# Altium PCB faketec-yuri_v1.1.PcbDoc
Units mm, origin at the board's own origin, x right, y up, seen from the top; angles counter-clockwise.
Board outline 51.18 x 53.34 mm, 2 copper layers (Top Layer, Bottom Layer); 33 components, 36 nets, 196 pads, 147 vias.
Unrouted connection lines stored in the file: 2.
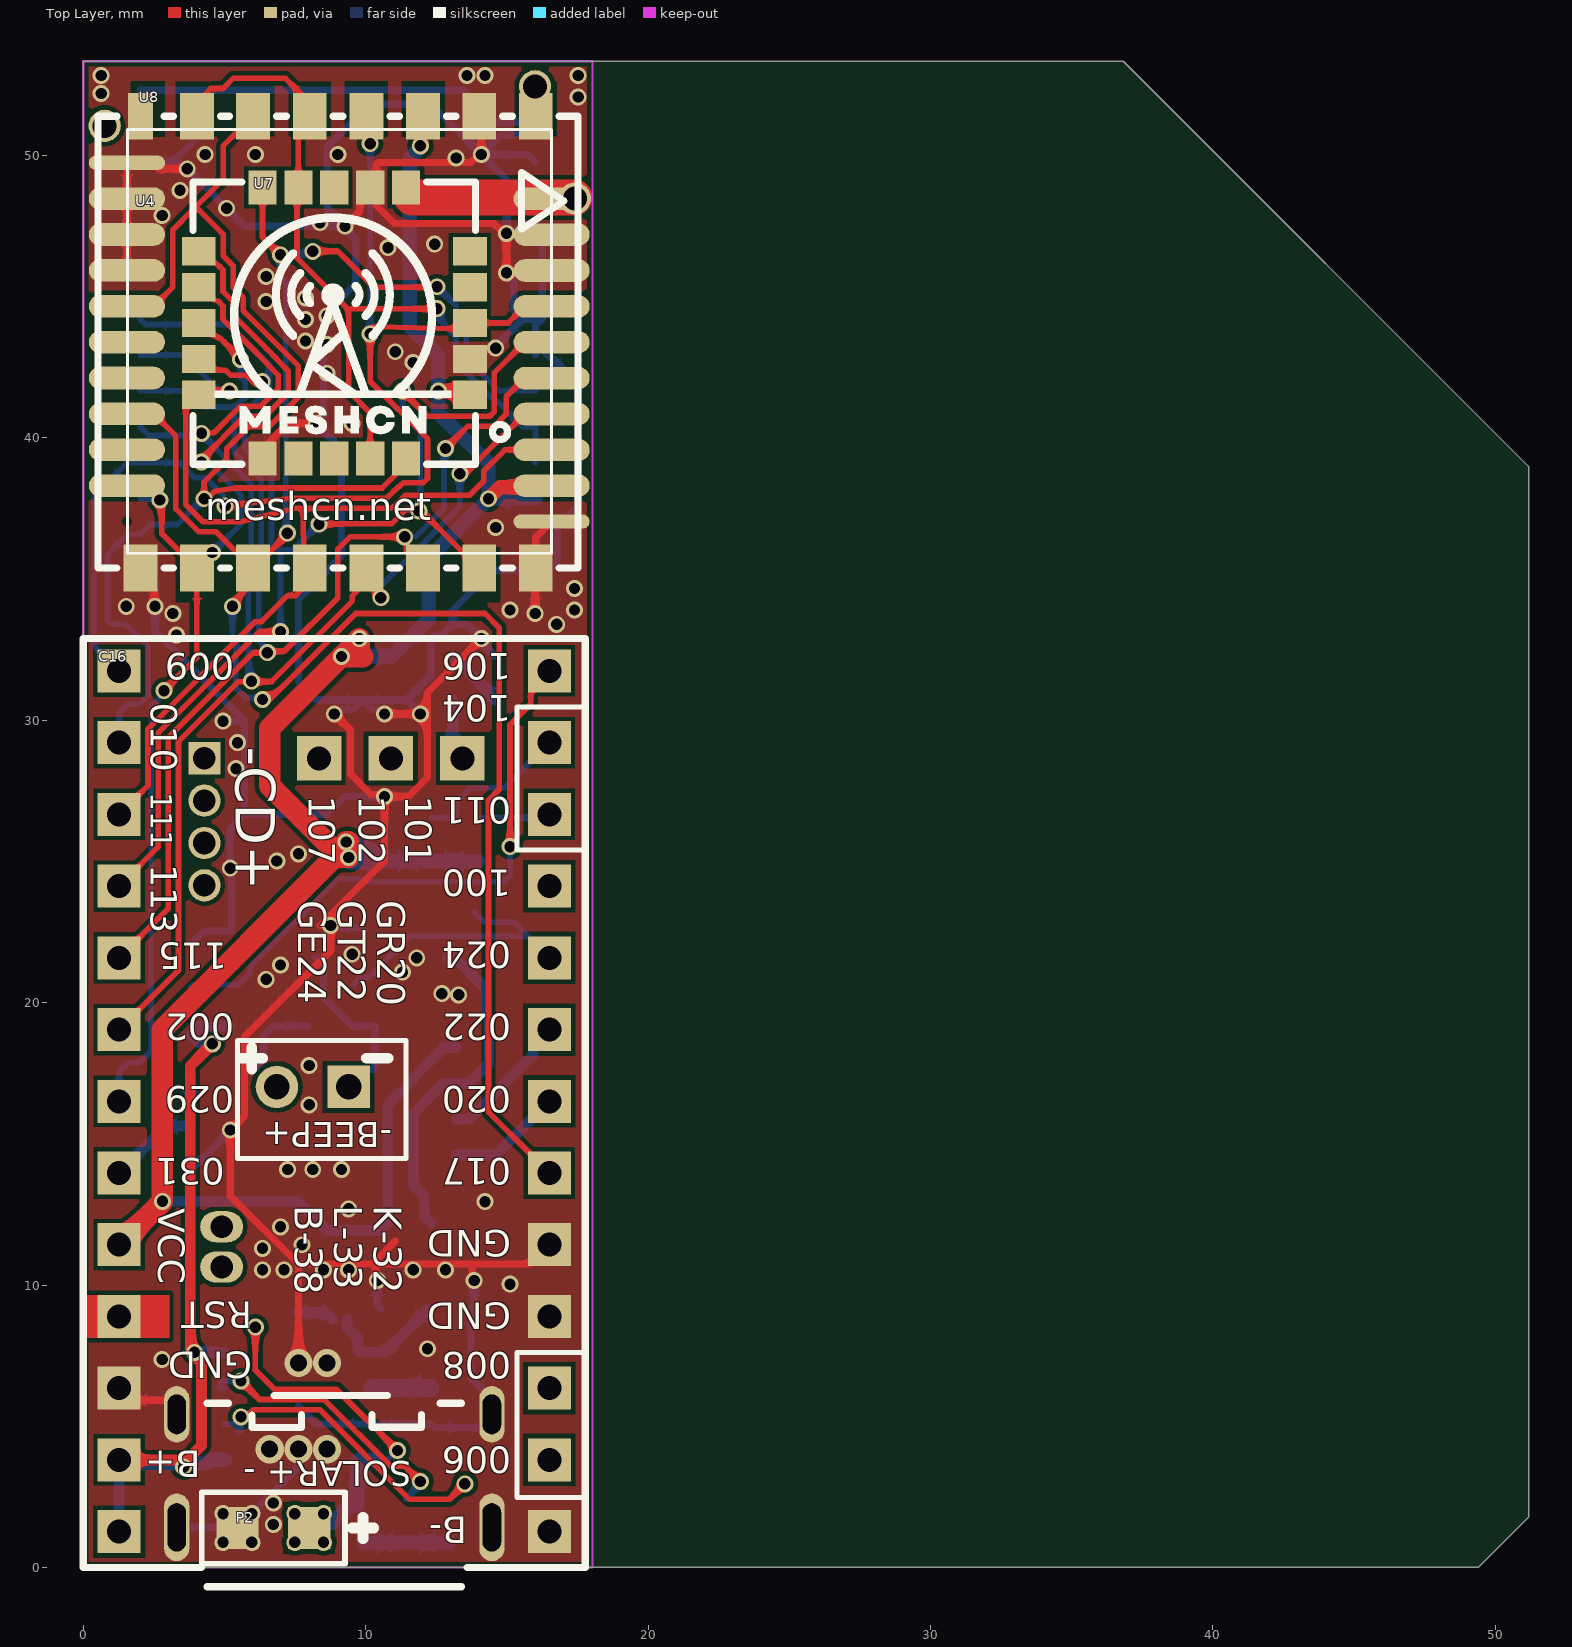
[diagram p0: Top Layer view]
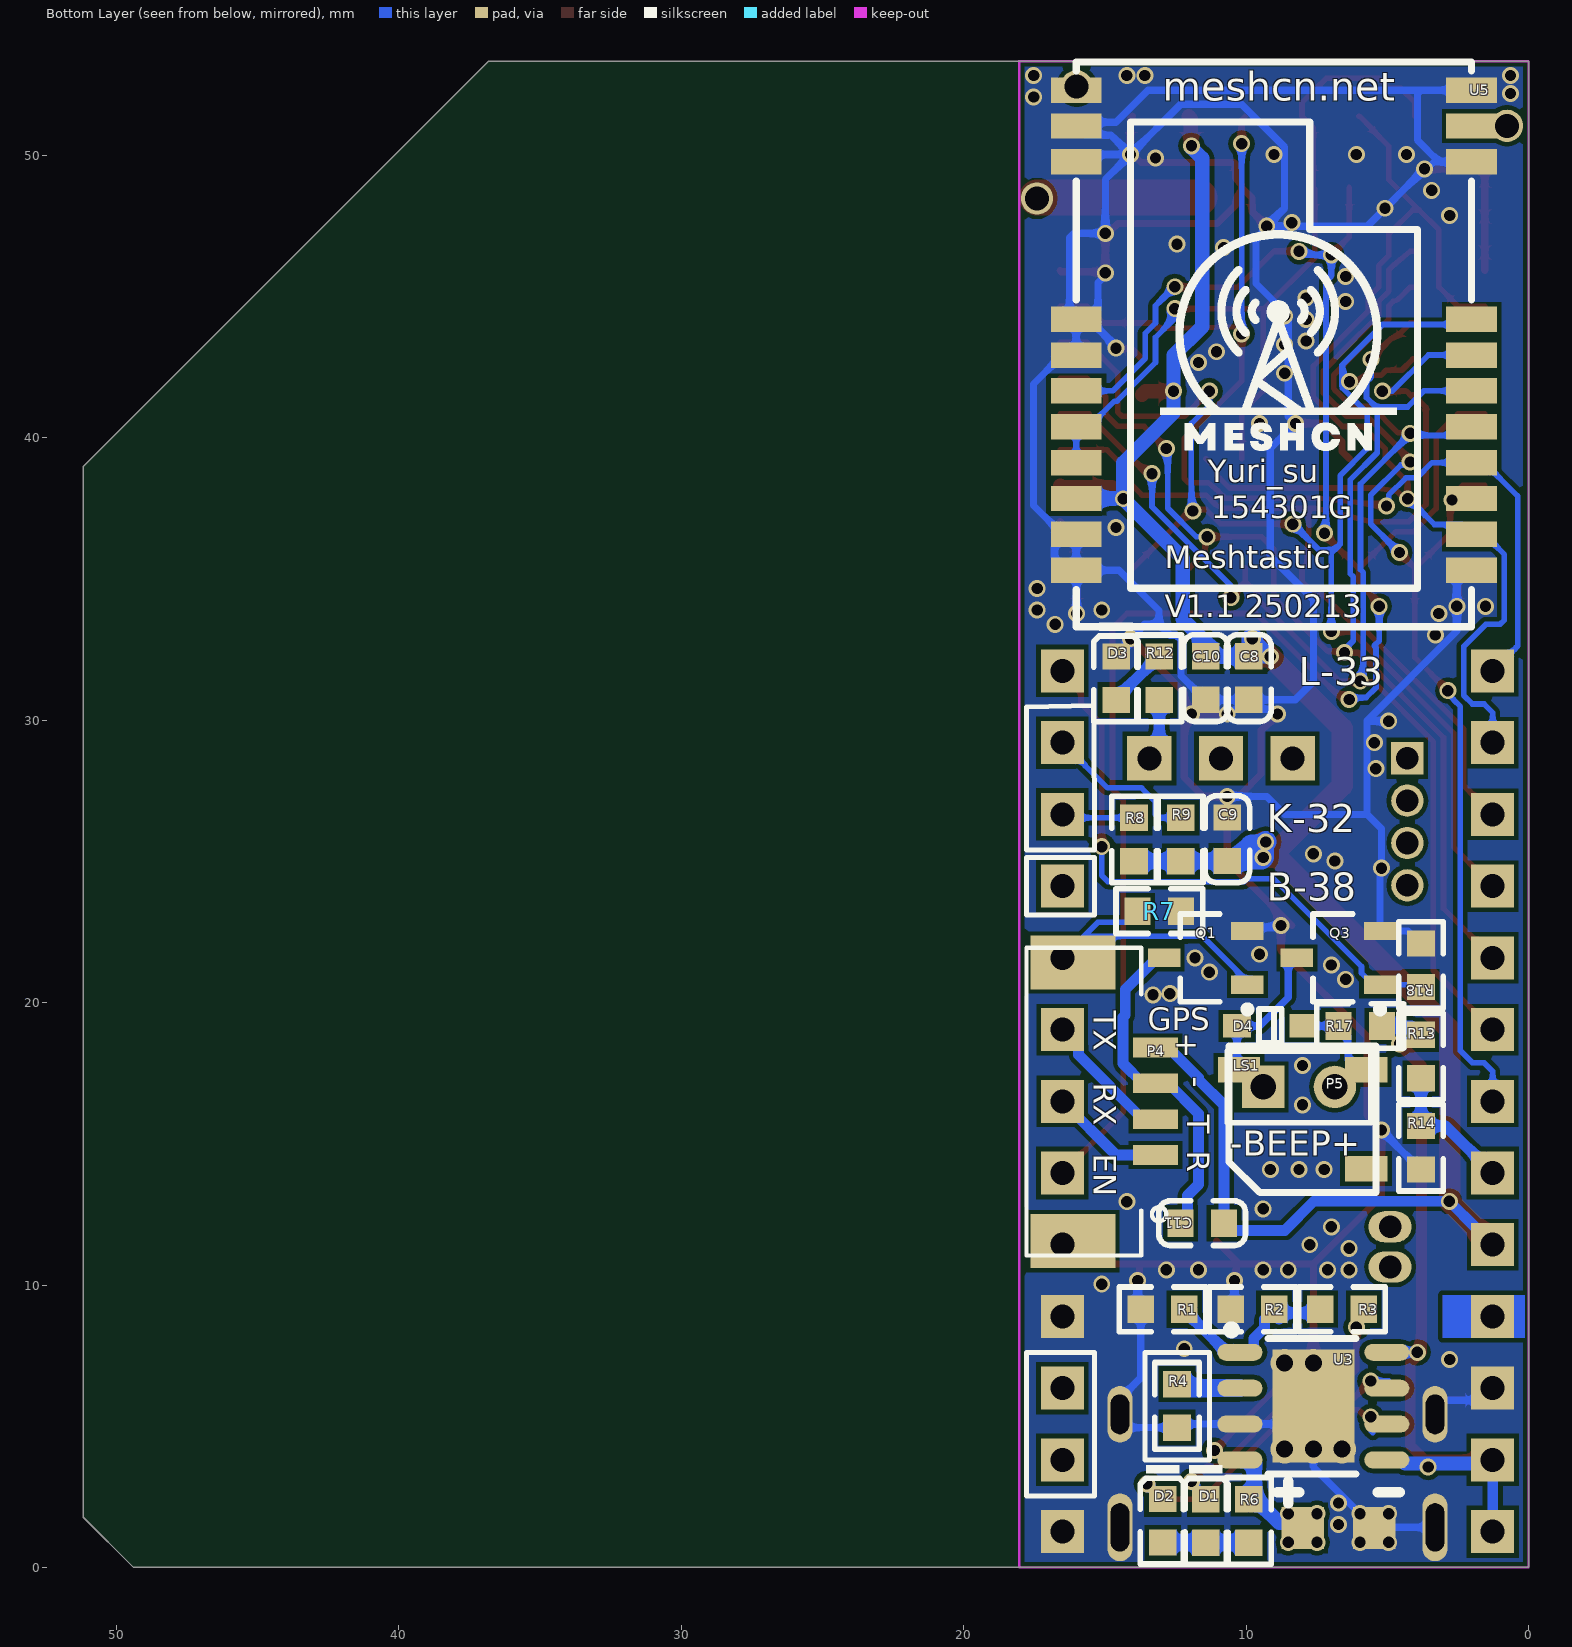
[diagram p1: Bottom Layer view, seen from below]
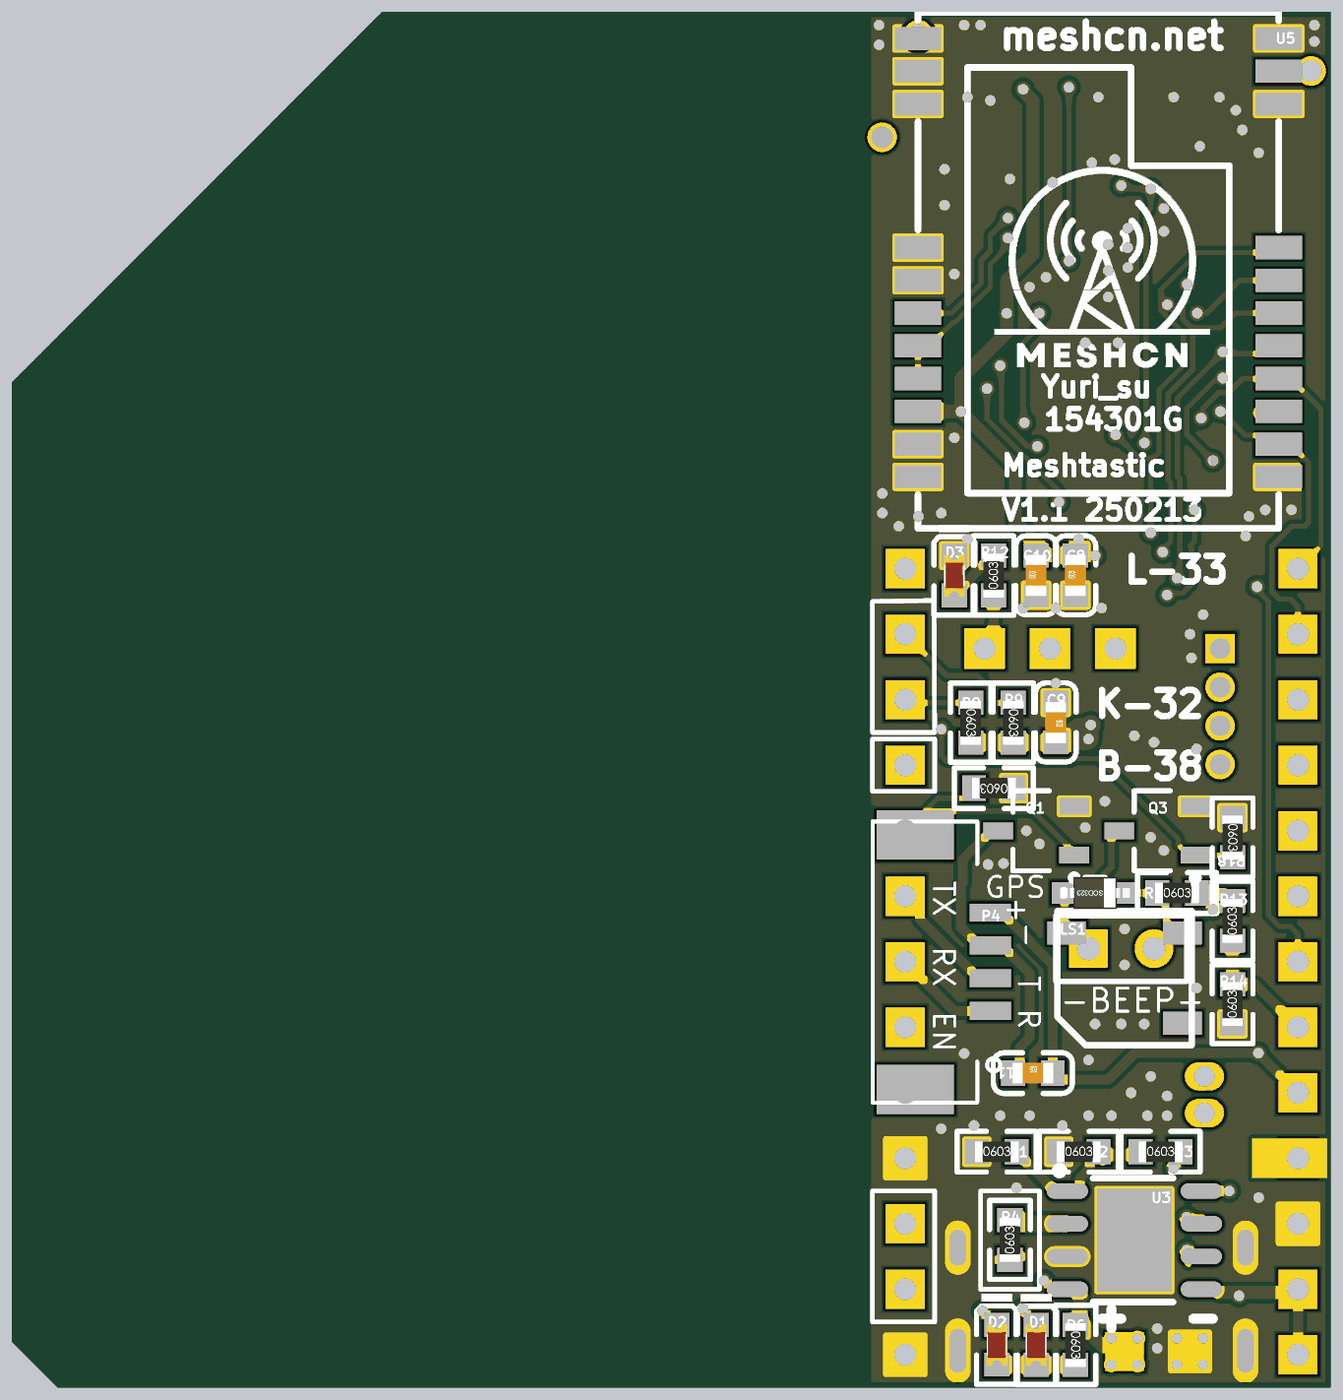
[diagram p2: 3D render of the assembled board from below, using the file's embedded part models]

## Layer stack, top to bottom
Top Solder: solder mask 0.0102, Solder Resist, Dk 3.5
Top Layer: signal copper 0.0356
Dielectric 1: dielectric 0.32, FR-4, Dk 4.8
Bottom Layer: signal copper 0.0356
Bottom Solder: solder mask 0.0102, Solder Resist, Dk 3.5

## Board outline
0,0 0,53.34 36.83,53.34 51.181,38.989 51.181,1.778 49.403,0 0,0

## Design rules (kind name [scope] priority, off if disabled: settings)
Clearance [All] p1: gap=0.16 ignorepadtopadclearanceinfootprint=FALSE except(0: Arc-Hole Track-Hole SMDPad-Hole THPad-Hole Via-Hole Fill-Hole Poly-Hole Region-Hole Text-Hole)
ComponentClearance [All] p1: gap=-100 collisioncheckmode=3 verticalgap=0.254 showdistances=FALSE
HoleSize [All] p1: absolutevalues=TRUE maxlimit=5 minlimit=0.025 maxpercent=80.000 minpercent=20.000
HoleSize Testpoint [All] p2: absolutevalues=TRUE maxlimit=2.54 minlimit=0.025 maxpercent=80.000 minpercent=20.000
HoleSize TestPointUsage [All] p3: absolutevalues=TRUE maxlimit=2.54 minlimit=0.025 maxpercent=80.000 minpercent=20.000
HoleToHoleClearance [All] p1: gap=0 allowstackedmicrovias=TRUE
MinimumSolderMaskSliver [All] p1: minsoldermaskwidth=0
PlaneClearance [All] p1: clearance=0.35
PlaneConnect [All] p1: planeconnectstyle=Direct reliefexpansion=0.508 reliefentries=4 reliefconductorwidth=0.254 reliefairgap=0.254
PolygonConnect [All] p1: connectstyle=Direct reliefconductorwidth=0.4 reliefentries=4 polygonreliefangle="90 Angle" airgapwidth=0.254
RoutingVias [All] p1: holewidth=0.4 width=0.7 viastyle="Through Hole" minholewidth=0.3 minwidth=0.6 maxholewidth=2 maxwidth=4
SilkToSilkClearance [All] p1: silktosilkclearance=0
SilkToSolderMaskClearance [IsPad] p1: minsilkscreentomaskgap=0 clearancetoexposedcopper=TRUE
SolderMaskExpansion [All] p1: expansion=0.102 istentingtop=FALSE
Width [All] p1: maxlimit=10 minlimit=0.2 preferedwidth=0.254 minimp=50.000000 maximp=50.000000 favimp=50.000000
22 further rules are at their usual default settings.

## Components (designator, comment, footprint, x,y, rotation, side; value= is the part's Value field where it differs from the comment)
C8 "22uF (226) 20% 6.3V" 0603_C 9.906,31.496 r90 bottom
C9 "22uF (226) 20% 6.3V" 0603_C 10.668,25.789 r270 bottom
C10 "22uF (226) 20% 6.3V" 0603_C 11.43,31.496 r90 bottom
C11 "22uF (226) 20% 6.3V" 0603_C 11.557,12.192 r180 bottom
C16 "PROMICRO NRF52840 方形焊盘-BBB" "PROMICRO NRF52840" 8.763,15.24 r180 top locked
D1 "红灯 0603" 0603_LED_S1 11.43,1.651 r270 bottom
D2 "绿灯 0603" 0603_LED_S1 12.954,1.659 r270 bottom
D3 "蓝灯 0603" 0603_LED_S1 14.605,31.488 r270 bottom
D4 "1N4148WS T4" SOD-323 9.144,19.177 r0 bottom
LS1 "5020蜂鸣器" PB5020 8.001,15.875 r0 bottom
P2 "SOLAR" HDR1X2#1 5.461,1.397 r0 top
P4 "GPS" HT1.25-4 13.208,14.605 r90 bottom
P5 "BEEP" HDR1X2#2 9.398,17.018 r180 bottom
Q1 "AO3400A N道沟 X0YV1T SOT-23" SOT-23-3L 11.43,21.59 r180 bottom
Q3 "AO3400A N道沟 X0YV1T SOT-23" SOT-23-3L 6.731,21.59 r180 bottom
R1 "SDNT1608X103F3450FTF" 0603_R 12.962,9.144 r180 bottom
R2 "10K" 0603_R 9.779,9.144 r180 bottom
R3 "2K" 0603_R 6.604,9.144 r180 bottom
R4 "1.2K" 0603_R 12.446,5.723 r90 bottom
R6 "10K" 0603_R 9.906,1.651 r270 bottom
R7 "10K" 0603_R 13.073,23.241 r0 bottom
R8 "10K" 0603_R 13.97,25.781 r270 bottom
R9 "10K" 0603_R 12.319,25.781 r270 bottom
R12 "10R" 0603_R 13.081,31.488 r90 bottom
R13 "1M" 0603_R 3.81,18.097 r90 bottom
R14 "1.5M" 0603_R 3.81,14.867 r90 bottom
R17 "10R" 0603_R 5.961,19.177 r180 bottom
R18 "10K" 0603_R 3.81,21.328 r270 bottom
U3 "CN3163" SOP-8_EP_150mil 7.62,5.715 r270 bottom
U4 "SX1268TZR4-GC" SX1268TZR4-GC 16.585,50.927 r270 top locked
U5 "E22-400M22S" E22-400M22S 9.017,43.815 r0 bottom locked
U7 "E22-400MM22S" E22-400MM22S 8.89,44.069 r180 top value=470MHz；433MHz
U8 "Ra-01s" RA-01 9.026,43.395 r270 top locked

## Footprints (in the part's own frame and the unit in brackets; to place one, negate y for a bottom-side part, rotate by r counter-clockwise, add the part's x,y. Pads: shape width x height; smd on the part's side, far side on the other; paste and mask are expansions set on the pad)
0603_C [mm]
  rect 0.93x0.98 smd: 1(-0.77,0) 2(0.77,0)
  silkscreen extent -1.53,-0.79 1.54,0.79, body extent -0.8,-0.4 0.8,0.4, height 0.3
0603_LED_S1 [mm]
  rect 0.93x0.98 smd: A(0.77,0) K(-0.77,0)
  silkscreen extent -1.97,-0.79 1.54,0.79, body extent -0.8,-0.4 0.8,0.4, height 0.6
0603_R [mm]
  rect 0.93x0.98 smd: 1(-0.77,0) 2(0.77,0)
  silkscreen extent -1.53,-0.79 1.54,0.79, body extent -0.85,-0.4 0.85,0.4, height 0.56
E22-400M22S [mm]
  rect 1.8x0.9 smd: 1(7,-8.5) 2(7,-7.23) 3(7,-5.96) 4(7,-0.39) 5(7,0.88) 6(7,2.15) 7(7,3.42) 8(7,4.69) 9(7,5.96) 10(7,7.23) 11(7,8.5) 12(-7,8.5) 13(-7,7.23) 14(-7,5.96) 15(-7,4.69) 16(-7,3.42) 17(-7,2.15) 18(-7,0.88) 19(-7,-0.39) 20(-7,-5.96) 21(-7,-7.23) 22(-7,-8.5)
  silkscreen extent -7,-9.5 7,10.5
E22-400MM22S [mm]
  rect 1.2x1 smd: 1(-4.8,2.54) 2(-4.8,1.27) 3(-4.8,0) 4(-4.8,-1.27) 5(-4.8,-2.54) 11(4.8,-2.54) 12(4.8,-1.27) 13(4.8,0) 14(4.8,1.27) 15(4.8,2.54)
  rect 1x1.2 smd: 6(-2.54,-4.8) 7(-1.27,-4.8) 8(0,-4.8) 9(1.27,-4.8) 10(2.54,-4.8) 16(2.54,4.8) 17(1.27,4.8) 18(0,4.8) 19(-1.27,4.8) 20(-2.54,4.8)
  silkscreen extent -6.14,-5 5,5
HDR1X2#1 [mm] "Connector; Header; 2 Position"
  rect 1.5x1.5 all layers, no hole: 1(0,0) 2(2.54,0)
  silkscreen extent -1.27,-1.27 3.81,1.27
HDR1X2#2 [mm] "Connector; Header; 2 Position"
  rect 1.5x1.5 hole 0.9: 1(0,0)
  round 1.5 hole 0.9: 2(2.54,0)
  silkscreen extent -1.27,-1.27 3.81,1.27
HT1.25-4 [mm]
  rect 1.905x3 smd: 0(-3.048,2.921) 0(6.818,2.921)
  rect 0.7x1.6 smd: 1(0,0) 2(1.27,0) 3(2.54,0) 4(3.81,0)
  silkscreen extent -3.56,-0.38 7.35,4.57
PB5020 [mm] "贴片电磁无源蜂鸣器"
  rect 1.5x0.9 smd: 1(-2.25,-1.75) 2(2.25,-1.75) 3(-2.25,1.75)
  silkscreen extent -2.6,-2.6 2.6,2.6, body extent -2.62,-2.58 2.6,2.58, height 2.2
"PROMICRO NRF52840" [mil]
  oval 60x43.31 hole 31.5: 0(152,124.97) 0(152,181.03)
  rect 45x45 hole 31.5: 0(176.03,-528.21)
  round 39.37 smd: 0(176.03,-528.21) 0(176.03,-469.15) 0(176.03,-410.13) 0(176.03,-351.09)
  round 45 hole 31.5: 0(176.03,-469.15) 0(176.03,-410.13) 0(176.03,-351.09)
  rect 60x60 hole 33.46: 1(295,550) 2(295,450) 3(295,350) 4(295,250) 5(295,150) 6(295,50) 7(295,-50) 8(295,-150) 9(295,-250) 10(295,-350) 11(295,-450) 12(295,-550) 13(295,-650) 14(-305,-650) 15(-305,-550) 16(-305,-450) 17(-305,-350) 18(-305,-250) 19(-305,-150) 20(-305,-50) 21(-305,50) 22(-305,150) 23(-305,250) 24(-305,350) 25(-305,450) 26(-305,550)
  oval 35x78.74 hole 25.59 slot 55.12 at 90 deg paste+0 mask+2: 26(-224.69,386.51) 26(214.68,386.51)
  oval 35x94.49 hole 25.59 slot 66.93 at 90 deg paste+0 mask+2: 26(-224.69,543.99) 26(214.68,543.99)
  rect 62x62 hole 33.46: 27(-183.74,-528.16) 28(-83.74,-528.16) 29(16.26,-528.16)
  silkscreen extent -355,-695 345,627
RA-01 [mm]
  rect 1.651x1.199 smd paste+0 mask+0.051: 1(-8,7) 2(-8,5) 3(-8,3.01) 4(-8,1.003) 5(-8,-1.003) 6(-8,-3.01) 7(-8,-5) 9(8,-7) 10(8,-5) 11(8,-3.01) 12(8,-1.003) 13(8,1.003) 14(8,3.01) 15(8,5) 16(8,7)
  rect 1.651x0.889 smd paste+0 mask+0.051: 8(-8,-7)
  silkscreen extent -8,-8.5 8,8.5
SOD-323 [mm]
  rect 1x0.83 smd: 1(1.18,0) 2(-1.18,0)
  silkscreen extent -0.4,-0.6 0.4,0.6, body extent -1.35,-0.63 1.35,0.62, height 1.1
SOP-8_EP_150mil [mm]
  oval 0.6x1.6 smd: 1(-1.905,-2.6) 2(-0.635,-2.6) 3(0.635,-2.6) 4(1.905,-2.6) 5(1.905,2.6) 6(0.635,2.6) 7(-0.635,2.6) 8(-1.905,2.6)
  rect 4x2.9 smd: 9(0,0)
  silkscreen extent -2.85,-3.05 2.4,1.5
SOT-23-3L [mm] "http://www.aosmd.com/res/packaging_information/SOT-23-3L.pdf"
  rect 1.15x0.65 smd: 1(1.475,-0.95) 2(1.475,0.95) 3(-1.475,0)
  silkscreen extent -0.9,-1.95 1.6,1.55, body extent -0.9,-1.55 0.9,1.55, height 1.25
SX1268TZR4-GC [mm]
  oval 0.508x2.7 smd: 1(1.184,-15.037) 12(13.888,0.002)
  oval 0.8x2.7 smd: 2(2.454,-15.037) 3(3.724,-15.037) 4(4.994,-15.037) 5(6.264,-15.037) 6(7.534,-15.037) 7(8.804,-15.037) 8(10.074,-15.037) 9(11.344,-15.037) 10(12.614,-15.037) 13(12.618,0.002) 14(11.348,0.002) 15(10.078,0.002) 16(8.808,0.002) 17(7.538,0.002) 18(6.268,0.002) 19(4.998,0.002) 20(3.728,0.002) 21(2.458,0.002)
  round 0.025 smd: 11(13.884,-15.037) 22(1.188,0.002)
  silkscreen extent 0,-15.01 15.01,0

## Part data
C8 C9 C10 C11: library part "0603 22uF (226) 20% 6.3V", "贴片电容", Package=0603, SuppliersPartNumber=C59461, ComponentLink1Description=供应商链接, ComponentLink1URL=http://www.szlcsc.com/product/details_60514.html, Supplier=LC
D1: library part "0603 黄灯", "发光二极管", Package=0603, SuppliersPartNumber=C72038, ComponentLink1Description=供应商链接, ComponentLink1URL=http://www.szlcsc.com/product/details_73147.html, Supplier=LC
D2: library part "0603 绿灯", "发光二极管", Package=0603, SuppliersPartNumber=C72043, ComponentLink1Description=供应商链接, ComponentLink1URL=http://www.szlcsc.com/product/details_73152.html, Supplier=LC
D3: library part "0603 蓝灯", "发光二极管", Package=0603, SuppliersPartNumber=C72041, ComponentLink1Description=供应商链接, ComponentLink1URL=http://www.szlcsc.com/product/details_73150.html, Supplier=LC
D4: library part "SOD-323 1N4148WS T4", "二极管", Package=SOD-323, SuppliersPartNumber=C2128, ComponentLink1Description=供应商链接, ComponentLink1URL=http://www.szlcsc.com/product/details_2485.html, Supplier=LC
LS1: library part Bell, "蜂鸣器", LatestRevisionDate=17-Jul-2002, LatestRevisionNote="Re-released for DXP Platform.", PackageReference=PIN2, Published=24-Mar-1999, WWW=https://item.szlcsc.com/97698.html
P2 P5: library part "Header 2", "Header, 2-Pin", LatestRevisionDate=17-Jul-2002, LatestRevisionNote="Re-released for DXP Platform.", Publisher="Altium Limited"
P4: library part "Header 4", "Header, 4-Pin", LatestRevisionDate=17-Jul-2002, LatestRevisionNote="Re-released for DXP Platform.", Publisher="Altium Limited"
Q1 Q3: "MOS(场效应管)", Package=SOT-23, SuppliersPartNumber=C20917, ComponentLink1Description=供应商链接, ComponentLink1URL=http://www.szlcsc.com/product/details_21629.html, Supplier=LC
R1 R2 R3 R4 R7 R18: library part "0603 2.4KΩ (2401) 1%", "贴片电阻", Package=0603, SuppliersPartNumber=C22940, ComponentLink1Description=供应商链接, ComponentLink1URL=http://www.szlcsc.com/product/details_23667.html, Supplier=LC
R6 R8 R9 R13 R14: library part Res2, "Resistor", LatestRevisionDate=17-Jul-2002, LatestRevisionNote="Re-released for DXP Platform.", PackageReference=AXIAL-0.4, Published=8-Jun-2000, Publisher="Altium Limited"
R12: library part "0603 10Ω (10R0) 1%", "贴片电阻", Package=0603, SuppliersPartNumber=C22859, ComponentLink1Description=供应商链接, ComponentLink1URL=http://www.szlcsc.com/product/details_23586.html, Supplier=LC
R17: library part "0603 100KΩ (1003) 1%", "贴片电容", Package=0603, SuppliersPartNumber=C25803, ComponentLink1Description=供应商链接, ComponentLink1URL=http://www.szlcsc.com/product/details_26546.html, Supplier=LC
U3: JLCPCB Part Class="Extended Part", Manufacturer=CONSONANCE(上海如韵), Add into BOM=yes, Convert to PCB=yes, Datasheet=https://atta.szlcsc.com/upload/public/pdf/source/20200525/C559031_07C3DFF767A107D34DBB0F6756A9105C.pdf, Device=CN3163, LCSC Part Name=CN3163, Manufacturer Part=CN3163, Supplier=LCSC, Supplier Footprint=ESOP-8, Supplier Part=C559031, Symbol=CN3163
U4: library part E22-400M22S, JLCPCB Part Class="Extended Part", Manufacturer=硅传, Add into BOM=yes, Convert to PCB=yes, Device=SX1268TZR4-GC, Manufacturer Part=SX1268TZR4-GC, Origin Footprint=WIRELM-SMD_E22-400M22S, Supplier=LCSC, Symbol=SX1268TZR4-GC
U5: JLCPCB Part Class="Extended Part", Manufacturer=EBYTE(亿佰特), Add into BOM=yes, Convert to PCB=yes, Device=E22-400M22S, Manufacturer Part=E22-400M22S, Origin Footprint=WIRELM-SMD_E22-400M22S, Supplier=LCSC, Supplier Part=C411291, Symbol=E22-400M22S
U7: library part E220-400MM22S, JLCPCB Part Class="Extended Part", LCSC Part Name=LoRa扩频无线模块进口LLCC68+PA+LNA低功耗433M小体积, Manufacturer=EBYTE(亿佰特), Add into BOM=yes, Convert to PCB=yes, Datasheet=https://atta.szlcsc.com/upload/public/pdf/source/20230113/ADF9FB7794EF3DB1C0D0199CB3018B5B.pdf, Device=E220-400MM22S, Manufacturer Part=E220-400MM22S, Supplier=LCSC, Supplier Footprint=SMD,10x10mm, Supplier Part=C5352932, Symbol=E220-400MM22S
U8: library part Ra-01, "SX1278LoRa扩频无线模块/超远10KM/433M/安信可Ra-01", JLCPCB Part Class=扩展库, LCSC Part Name="SX1278LoRa扩频无线模块/超远10KM/433M  配天线（两件套）", Manufacturer=Ai-Thinker(安信可), Add into BOM=yes, Convert to PCB=yes, Datasheet=https://atta.szlcsc.com/upload/public/pdf/source/20180719/C90040_7D0E540C57BE745D85EF9B627FE97069.pdf, Device=Ra-01, Manufacturer Part=Ra-01s, Supplier=LCSC, Supplier Footprint=-, Supplier Part=C90040, Symbol=RA-01
C16: Add into BOM=yes, Convert to PCB=yes, Device="PROMICRO NRF52840 方形焊盘-BBB", Origin Footprint="PROMICRO NRF52840", Supplier=JaDoma, Symbol="PROMICRO NRF52840 方形焊盘-BBB"

## Free pads (board coordinates)
  round 1.143 hole 0.85: 2(0.762,51.054) 2(16.002,52.451) 2(17.408,48.482)

## Via types
v1: diameter 0.6, hole 0.4, Top Layer to Bottom Layer, tented both sides, 142 vias
v2: diameter 1, hole 0.6, Top Layer to Bottom Layer, tented both sides, 5 vias

## Nets (pads, with @x,y where several pads share a name; then routed paths per layer and width w, separated by ;. In a path a pad name is that pad's centre, name@x,y a point inside that pad or via, vN(x,y) a via of type N, cw(c..) or ccw(c..) an arc to the next point about the centre after c; other vN are vias at no path point)
3V3: C8.2 C9.2 C10.2 C11.2 C16.5 P4.4 R8.2 R9.2 U4.13 U5.9 U7.1 U8.3 | length 85.4
  Top Layer w0.508: v1(11.938,50.343) 11.956,50.361 11.956,51.315 U8.3 ; v1(12.573,41.656) 13.563,41.656 U7.1 ; v1(14.351,37.846) 14.758,38.253 16.531,38.253 U4.13
  Top Layer w0.762: C16.5 2.794,12.954 2.794,19.05 8.89,25.146 v1(9.398,25.146) v1@9.398,25.693 ; 8.939,25.235 8.997,25.293 ; v1(9.31,25.693) 9.31,25.606 8.997,25.293 ; 8.997,25.293 6.604,27.686 6.604,29.718 v1(9.144,32.258) ; v1(9.144,32.258) 9.906,32.258 9.779,32.385 v1(9.779,32.893) v1(9.144,32.258)
  Bottom Layer w0.381: C16.5 1.841,12.002 v1(2.806,12.966) 7.608,12.966 8.636,11.938 10.533,11.938 C11.2 10.787,16.375 11.684,17.272 11.684,17.341 12.758,18.415 P4.4
  Bottom Layer w0.508: v1(9.144,32.258) v1@9.148,32.262 ; v1(9.31,25.693) 9.867,25.693 10.33,25.23 10.457,25.23 C9.2 ; v1(9.779,32.893) v1@9.148,32.262 ; C9.2@10.559,25.103 10.643,25.019 C9.2 ; v1(11.938,50.343) 11.938,50.28 11.557,49.899 11.557,43.942 12.573,42.926 v1(12.573,41.656) 12.573,40.894 14.351,39.116 v1(14.351,37.846) ; R8.2 13.966,25.015 10.672,25.015 C9.2 ; U5.9 14.36,37.855 v1(14.351,37.846) ; v1@9.148,32.262 9.902,32.262 C8.2 10.93,32.266 12.24,33.576 12.24,35.735 v1(14.351,37.846)
  Bottom Layer w0.762: v1(9.31,25.693) 9.398,25.606 v1(9.398,25.146) 9.441,25.103 C9.2@10.559,25.103 ; v1(9.779,32.893) 9.779,32.393 C8.2
ADC: C16.6 R13.1 R14.2 | length 4.9
  Bottom Layer w0.381: C16.6 2.937,15.637 R14.2 R13.1
ANT: pad.2 U4.21 U5.21 U7.6 U8.1 | length 5.8
  Top Layer w1.27: U7.6@11.643,48.514 pad.2@17.408,48.514
BAT: C16.1 C16.2 R13.2 R17.2 U3.5 U3.8 | length 27.9
  Top Layer w0.381: C16.2 3.683,3.81 4.191,4.318 4.191,7.239 v1@3.937,7.493 ; v1(3.937,7.62) v1@3.937,7.493 ; v1(4.572,18.542) 3.79,17.76 3.79,7.64 v1@3.937,7.493
  Bottom Layer w0.381: C16.1 C16.2 ; v1(3.937,7.62) U3.8 ; v1(4.572,18.542) 4.513,18.542 4.462,18.593 4.085,18.593 R13.2 3.835,18.868 4.145,19.177 R17.2
  Bottom Layer w0.508: C16.2 1.397,3.683 4.368,3.683 4.495,3.81 U3.5
  other v1: 3.556,3.556
BEEP: C16.14 Q3.1 R18.2 | length 21
  Top Layer w0.2: v1(15.113,25.527) 15.113,29.845 15.848,30.58 15.848,31.088 C16.14
  Bottom Layer w0.2: R18.2 3.892,20.64 Q3.1 5.506,20.64 5.917,21.051 5.917,21.284 9.019,24.386 9.978,24.386 10.078,24.286 14.896,24.286 15.113,24.503 v1(15.113,25.527)
BUSY: C16.7 U4.10 U5.14 U7.11 U8.10 | length 41
  Top Layer w0.2: U4.10 2.335,38.314 2.634,38.014 2.634,37.876 v1(2.711,37.799) ; v1@2.784,37.799 2.784,36.608 3.998,35.395 U8.10 ; v1(2.857,31.052) 4.026,32.221 U8.10 ; U7.11 4.19,46.609 4.798,46.099 4.95,45.947 4.95,45.186 5.31,44.826 5.31,44.346 5.369,44.287 6.492,43.164 7.26,42.372 7.26,41.59 7.201,41.532 6.437,40.767 5.716,40.767 4.191,39.242 v1(4.191,39.146) ; v1(4.572,35.941) U8.10
  Bottom Layer w0.2: C16.7 1.27,17.572 1.574,17.876 1.988,17.876 2.413,18.301 2.413,30.492 2.652,30.731 2.652,30.738 2.857,30.944 v1(2.857,31.052) ; U5.14 2.655,37.855 v1(2.711,37.799) ; v1(4.191,39.146) 4.297,39.039 4.522,39.039 5.588,37.973 5.588,36.957 v1(4.572,35.941)
CS: C16.10 U4.17 U5.19 U7.14 U8.15 | length 51
  Top Layer w0.2: C16.10 2.652,25.512 2.652,29.546 6.241,33.134 6.972,33.134 v1(6.985,33.147) ; U7.14 4.49,42.399 5.044,42.399 5.227,42.216 5.79,42.216 6.104,41.902 6.117,41.914 6.263,41.914 v1(6.34,41.991) ; v1(8.348,36.946) 8.413,36.957 10.911,36.957 11.419,37.465 11.834,37.465 v1(11.886,37.413) ; v1(11.303,41.656) 12.19,40.769 14.398,40.769 14.55,40.921 14.55,42.303 15.636,43.389 U4.17 ; v1@11.927,37.465 13.998,35.395 U8.15
  Bottom Layer w0.2: U5.19 2.205,44.017 5.162,44.017 6.604,42.575 v1@6.604,41.991 ; v1(6.34,41.991) v1@6.604,41.991 ; v1@6.552,41.799 6.604,41.851 v1@6.604,41.991 ; 6.586,41.765 5.715,40.894 5.715,39.625 6.668,38.672 6.668,36.24 6.868,36.04 ; v1(6.985,33.147) 6.985,35.923 6.868,36.04 ; v1(8.348,36.946) 8.337,36.946 7.431,36.04 6.868,36.04 ; v1(11.303,41.656) 11.303,41.148 11.938,40.513 11.938,37.465 v1(11.886,37.413)
GND: C8.1 C9.1 C10.1 C16.3 C16.22 C16.23 C16.26 D3.K P2.1 Q1.2 Q3.2 R1.1 R2.1 R7.1 R14.1 R18.1 U3.3 U3.9 U4.1 U4.2 U4.3 U4.4 U4.12 U4.19 U4.20 U4.22 U5.1 U5.2 U5.3 U5.4 U5.5 U5.10 U5.11 U5.12 U5.20 U5.22 U7.2 U7.7 U7.16 U8.2 U8.9 U8.16 | length 227.1
  Top Layer w0.254: C16.3@1.429,6.191 1.7,5.92 2.824,5.92 ; U4.4 U4.3 U4.2 U4.1 2.462,49.744 2.675,49.53 v1(3.683,49.53) ; U8.9 2.498,34.922 2.498,34.078 v1(2.54,34.036) ; U7.16 6.604,39.523 6.604,39.878 7.239,40.513 v1(8.255,40.513) ; v2(7.62,7.239) 7.62,10.744 ; 8.382,22.733 10.668,25.019 v1(10.668,27.305) ; v1(8.763,22.733) 8.763,21.844 5.715,18.796 5.715,16.002 v1(5.207,15.494) 5.207,13.157 7.62,10.744 ; v1(8.89,30.226) 9.47,29.646 9.47,28.095 10.193,27.371 10.602,27.371 v1(10.668,27.305) ; v1(9.271,47.498) 9.787,48.014 9.787,48.496 U7.7 ; U7.7@10.16,48.874 10.16,48.866 10.16,48.769 cw(c9.621,48.23) 10.383,48.23 11.021,47.592 14.544,47.592 14.892,47.244 v1(14.986,47.244) v1(14.986,45.847) 15.027,45.888 16.545,45.888 U4.19 ; U7.7@10.16,48.969 10.381,49.19 10.381,49.701 10.436,49.756 13.721,49.756 14.003,50.038 v1(14.097,50.038) 14.097,51.323 U8.2 ; v1(10.414,10.16) 10.351,10.223 10.351,10.744 ; v1(10.668,30.226) v1(11.938,30.226) 12.065,30.226 v1@12.192,30.099 ; 11.049,11.557 10.351,10.858 ; U7.2 14.063,43.172 14.597,43.172 v1(14.605,43.18) ; v1(13.843,10.16) 13.777,10.226 13.777,10.683 13.716,10.744 ; v1(14.097,32.893) 12.192,30.988 v1@12.192,30.099 ; C16.22@15.875,10.795 15.824,10.744 13.716,10.744 ; C16.22@15.875,10.795 C16.22 ; v1(16.002,33.782) 16.002,35.371 U8.16 16.026,36.478 U4.12 ; 7.62,10.744 10.236,10.744 ; 10.236,10.744 10.351,10.744 ; 10.236,10.744 10.351,10.858 ; 10.351,10.744 13.716,10.744 ; 10.351,10.744 10.351,10.858 ; v1(10.668,27.305) 11.52,27.305 12.192,27.977 v1@12.192,30.099
  Bottom Layer w0.254: C16.3@1.429,6.191 1.7,5.92 2.824,5.92 ; U5.12 2.217,35.315 2.54,34.992 v1(2.54,34.036) 2.54,33.164 5.715,29.989 ; U5.20 3.166,49.775 ; U5.22 3.81,52.315 ; C16.26@3.31,1.423 5.435,1.423 P2.1 7.62,3.556 v2(7.62,4.191) ; R14.1 3.835,14.097 5.207,15.469 v1(5.207,15.494) ; R18.1 3.835,22.098 4.277,22.54 Q3.2 5.256,24.716 v1(5.207,24.765) 5.207,26.162 5.715,26.67 ; v1(4.953,29.972) 5.698,29.972 5.715,29.989 ; U3.9 8.255,5.08 U3.3 12.319,5.08 12.446,4.953 14.177,4.953 14.47,5.246 14.47,5.423 14.47,5.978 13.732,6.716 R1.1 13.843,9.255 v1(13.843,10.16) ; v1(8.763,22.733) 8.829,22.667 9.828,22.667 Q1.2 ; v1(8.89,30.226) 8.984,30.226 9.146,30.388 9.568,30.388 C8.1 ; v1(10.414,10.16) 10.414,9.279 R2.1 ; v1(10.668,27.305) 9.271,27.305 8.636,26.67 5.715,26.67 ; v1(10.668,30.226) 10.574,30.226 10.412,30.388 10.244,30.388 C8.1 ; v1(11.938,30.226) 11.938,30.243 C10.1@11.455,30.726 ; D3.K 14.58,32.258 14.163,32.675 14.163,32.827 v1(14.097,32.893) 13.589,33.401 13.081,33.401 ; v1(14.605,43.18) 14.605,43.243 U5.4@15.567,44.205 ; v1(14.986,45.847) 14.986,45.753 15.244,45.495 15.244,44.528 U5.4@15.567,44.205 ; v1(16.002,33.782) 16.002,35.3 U5.11 ; U5.10 U5.11 ; U5.5 U5.5@16.017,43.374 ; U5.3 15.754,50.038 v1(14.097,50.038) ; U5.2 U5.2@15.855,50.884 ; 3.166,49.775 3.344,49.775 3.589,49.53 v1(3.683,49.53) 5.715,47.498 v1(9.271,47.498) ; 3.166,49.775 3.937,50.546 3.937,52.188 3.81,52.315 ; 3.81,52.315 13.471,52.315 14.605,51.181 15.558,51.181 U5.2@15.855,50.884 ; 5.715,26.67 5.715,29.989 ; v1(9.271,47.498) 8.636,48.133 8.636,50.292 10.16,51.816 12.319,51.816 v1(14.097,50.038) ; v1(9.271,47.498) 9.271,47.404 9.652,47.023 9.652,45.466 8.509,44.323 8.509,40.767 v1(8.255,40.513) 9.144,39.624 9.144,35.814 7.62,34.29 7.62,31.369 8.263,30.726 C8.1 ; C8.1 C10.1 C10.1@11.455,30.726 ; C10.1@11.455,30.726 12.304,31.575 12.304,32.842 12.472,33.01 12.69,33.01 13.081,33.401 ; 13.081,33.401 13.081,33.892 14.504,35.315 U5.11 ; v1(14.097,50.038) 14.986,49.149 v1(14.986,47.244) 16.107,47.244 16.256,47.095 16.256,44.219 U5.4@16.242,44.205 ; v1(14.097,50.038) 14.781,50.722 15.694,50.722 U5.2@15.855,50.884 ; U5.4@15.567,44.205 U5.4 ; U5.11 16.467,35.315 16.79,35.638 16.79,36.872 17.526,37.608 17.526,41.912 16.634,42.804 16.587,42.804 U5.5@16.017,43.374 ; U5.5@16.017,43.374 U5.4@16.017,43.98 ; U5.4@16.017,43.98 U5.4@16.242,44.205 ; U5.4@16.017,43.98 U5.4 ; U5.4 U5.4@16.242,44.205
  other v1: 4.953,0.889 5.969,0.889 6.731,1.524 4.953,1.905 5.969,1.905 6.731,2.286 2.794,7.366 12.192,7.747 15.113,10.033 6.35,10.541 7.112,10.541 8.509,10.541 9.398,10.541 11.684,10.541 12.827,10.541 6.35,11.303 7.747,11.43 6.985,12.065 9.398,12.7 14.224,12.954 7.239,14.097 8.128,14.097 9.144,14.097 8.001,16.383 8.001,17.78 13.295,20.28 12.7,20.32 6.477,20.828 11.303,21.082 6.985,21.336 11.811,21.59 9.525,21.717 6.858,25.019 7.62,25.273 5.406,28.289 5.461,29.21 3.302,33.02 16.764,33.401 3.175,33.782 15.113,33.909 17.399,33.909 1.524,34.036 17.399,34.671 14.605,36.83 9.525,40.513 8.636,42.291 11.684,42.672 11.049,43.053 8.636,43.307 7.874,43.434 7.874,44.196 8.636,44.323 6.477,44.831 7.874,44.958 6.477,45.72 10.795,46.736 12.446,46.863 8.382,47.625 2.794,47.879 5.08,48.133 3.429,48.768 13.208,49.911 4.318,50.038 6.096,50.038 9.017,50.038 17.526,52.07 0.635,52.197 0.635,52.832 13.589,52.832 14.224,52.832 17.526,52.832
  other v2: 6.604,4.191 8.636,4.191 8.636,7.239
GPSEN: C16.18 Q1.1 R7.2 | length 10.2
  Bottom Layer w0.2: Q1.1@9.574,20.64 9.799,20.865 10.061,20.865 11.548,22.352 15.748,22.352 ; R7.2 13.843,23.216 14.208,22.851 15.249,22.851 15.748,22.352 ; C16.18 15.748,22.352
GPSRX: C16.20 P4.1 | length 4.1
  Bottom Layer w0.381: P4.1 14.605,14.605 C16.20
GPSTX: C16.19 P4.2 | length 4.8
  Bottom Layer w0.381: P4.2 13.658,15.875 15.938,18.155 15.938,18.478 C16.19
IRQ: C16.12 U4.5 U5.13 U7.20 U8.6 | length 43.1
  Top Layer w0.2: U4.5 2.498,44.664 3.175,45.341 3.175,47.371 3.873,48.069 ; U8.6 5.988,51.395 5.516,50.923 5.516,50.895 4.953,50.332 4.953,49.149 3.873,48.069 ; U7.20 11.03,38.869 11.03,38.671 10.92,38.561 10.586,38.227 5.362,38.226 5.347,38.224 4.741,38.132 4.637,38.093 4.389,37.846 v1(4.281,37.846) 4.281,38.444 5.08,39.243 5.08,39.622 5.865,40.407 6.586,40.407 7.62,41.441 7.62,42.545 5.729,44.436 5.67,44.495 5.67,44.975 5.31,45.335 5.31,46.096 4.953,46.453 4.953,47.214 4.894,47.272 4.097,48.069 3.873,48.069
  Bottom Layer w0.2: C16.12 1.27,30.272 1.574,30.576 1.988,30.576 2.292,30.88 2.292,32.62 1.511,33.401 1.006,33.401 0.857,33.55 0.857,35.875 1.567,36.585 U5.13 2.367,36.935 3.333,36.935 4.244,37.846 v1(4.281,37.846)
KEY: C16.17
LED: C16.27 R12.1 | length 2.2
  Bottom Layer w0.381: R12.1 13.081,29.004 C16.27
MISO: C16.8 U4.15 U5.16 U7.12 U8.13 | length 51.1
  Top Layer w0.2: C16.8 1.932,19.712 3.372,21.152 3.372,29.247 5.494,31.369 5.942,31.369 v1(5.959,31.386) ; U7.12 4.19,45.339 4.611,44.918 4.641,44.888 4.798,44.829 4.95,44.677 4.95,44.197 5.009,44.138 6.132,43.015 6.9,42.223 6.9,41.759 6.841,41.681 6.287,41.127 5.567,41.127 4.621,40.181 4.21,40.181 v1(4.191,40.162) ; v1@5.969,31.369 6.671,31.369 9.53,34.228 9.53,34.415 U8.13@9.973,34.858 ; U8.13 10.029,34.915 10.541,34.403 v1(10.541,34.342) ; v1(13.335,38.735) 13.522,38.735 U4.15@15.636,40.849 ; U4.15@15.558,40.849 U4.15@15.636,40.849 ; U4.15 U4.15@15.636,40.849
  Bottom Layer w0.2: U5.16 2.325,40.087 4.116,40.087 v1(4.191,40.162) ; v1@4.277,40.045 5.948,38.374 5.948,35.336 5.849,35.237 5.849,31.495 v1(5.959,31.386) ; v1(10.541,34.342) 10.541,34.767 13.335,37.561 v1(13.335,38.735)
MOSI: C16.9 U4.16 U5.17 U7.13 U8.14 | length 48.1
  Top Layer w0.2: C16.9 1.932,22.252 3.012,23.332 3.012,29.396 4.517,30.902 6.011,32.395 v1(6.519,32.395) ; U7.13 4.19,44.069 4.609,43.65 4.878,43.509 5.572,42.815 v1(5.572,42.783) ; v1@6.567,32.444 7.119,32.444 9.017,34.343 9.017,36.068 9.447,36.498 v1(11.381,36.498) 11.458,36.421 11.458,35.972 11.536,35.894 11.536,35.866 12.008,35.395 U8.14 ; v1(12.827,39.624) 13.612,40.409 14.547,40.409 14.976,40.839 14.976,41.459 15.636,42.119 U4.16
  Bottom Layer w0.2: U5.17 3.712,41.665 4.281,41.096 5.408,41.096 ; v1(5.572,42.783) 5.588,42.767 5.588,42.134 5.738,41.983 5.738,41.426 5.408,41.096 ; v1(6.519,32.395) 6.519,32.504 6.209,32.813 6.209,35.088 6.308,35.187 6.308,38.523 5.355,39.476 5.355,41.043 5.408,41.096 ; v1(11.381,36.498) 11.762,36.498 12.775,37.51 12.775,39.572 v1(12.827,39.624)
NetC11_1: C11.1 P4.3 Q1.3 | length 12
  Bottom Layer w0.381: C11.1 12.074,12.445 12.074,13.176 11.684,13.567 11.684,16.071 12.758,17.145 P4.3 13.658,17.145 14.359,17.846 14.359,19.487 14.278,19.567 14.278,20.467 13.155,21.59 Q1.3
NetD1_A: D1.A D2.A R6.2 | length 3.1
  Bottom Layer w0.508: R6.2 9.91,0.885 12.95,0.885 D2.A
NetD1_K: D1.K U3.7 | length 9.8
  Top Layer w0.2: v1(5.588,6.604) 6.244,5.948 8.531,5.948 10.896,3.583 11.403,3.583 v1(11.938,3.048)
  Bottom Layer w0.2: U3.7 4.82,6.376 4.86,6.532 4.948,6.604 v1(5.588,6.604) ; D1.K 11.938,2.929 v1(11.938,3.048)
NetD2_K: D2.K U3.6 | length 11.6
  Top Layer w0.2: v1(5.588,5.334) 5.665,5.411 5.855,5.411 6.032,5.588 8.382,5.588 11.557,2.413 12.963,2.413 v1(13.515,2.965)
  Bottom Layer w0.2: U3.6 5.327,5.08 5.511,4.895 5.511,4.776 5.588,4.852 v1(5.588,5.334) ; D2.K 12.979,2.429 v1(13.515,2.965)
NetD3_A: D3.A R12.2 | length 2.2
  Bottom Layer w0.381: R12.2 13.106,32.258 14.305,31.059 14.305,30.992 14.58,30.718 D3.A
NetD4_1: D4.1 LS1.2 P5.1 Q3.3 | length 5.4
  Bottom Layer w0.254: Q3.3 8.311,21.59 8.509,21.392 8.509,20.188 9.52,19.177 D4.1 10.324,17.698 LS1.2
NetD4_2: D4.2 LS1.1 P5.2 R17.1 | length 3.4
  Bottom Layer w0.254: LS1.1 6.051,17.625 6.393,17.967 6.393,18.839 R17.1 D4.2
NetR1_2: R1.2 R2.2 R3.1 U3.1 | length 5.7
  Bottom Layer w0.381: R3.1@7.62,9.017 8.617,9.017 R2.2@8.84,8.794 ; R2.2@9.348,8.794 9.348,8.492 9.735,8.105 9.735,7.721 9.836,7.62 U3.1 10.693,7.62 12.192,9.119 R1.2
NetR4_2: R4.2 U3.2 | length 2.3
  Bottom Layer w0.203: R4.2@12.303,6.35 R4.2
  Bottom Layer w0.635: U3.2 R4.2@12.303,6.35
NetRF1_1: 
RST: C16.13 U4.18 U5.15 U7.3 U8.4 | length 40.6
  Top Layer w0.2: v1(5.028,37.592) 7.356,37.866 10.734,37.866 10.983,38.105 11.345,38.409 12.038,38.409 12.19,38.561 12.19,39.977 10.16,42.007 10.16,43.888 10.277,43.943 10.363,43.943 13.138,43.873 13.334,44.069 15.046,44.069 15.636,44.659 U4.18 ; U8.4 10.16,51.263 v1(10.16,50.419)
  Bottom Layer w0.2: C16.13 0.387,32.633 0.387,37.945 1.567,39.125 U5.15 3.42,39.125 3.959,38.586 4.34,38.586 4.953,37.973 4.953,37.719 5.028,37.644 v1(5.028,37.592) ; v1(10.16,43.688) v1(10.16,50.419)
RSTPORT: C16.4 | length 0.4
  Top Layer w0.508: C16.4@1.563,9.183 C16.4@1.7,9.32
  Bottom Layer w0.508: C16.4@1.563,9.183 C16.4@1.7,9.32
RXD: C16.25
RXEN: C16.21 U5.6 U7.10 U8.11 | length 70.6
  Top Layer w0.2: 1.548,40.854 2.498,40.854 3.271,40.08 3.271,37.496 4.095,36.672 4.71,36.672 5.988,35.395 U8.11 ; v1(5.289,34.036) 5.366,34.113 5.366,34.265 6.016,34.915 U8.11 ; v1(6.35,30.734) 6.604,30.734 9.652,33.782 14.224,33.782 14.732,33.274 14.732,27.559 14.351,27.178 14.351,16.129 15.848,14.632 C16.21 ; U7.10 6.35,47.117 v1(6.985,46.482) ; v1(7.228,36.629) 7.228,36.579 6.044,35.395 U8.11 ; v1(8.128,46.609) 9.017,46.609 10.287,45.339 12.51,45.339 v1(12.525,45.354)
  Bottom Layer w0.2: v1(5.289,34.036) 5.289,32.811 5.461,32.639 5.399,32.577 5.399,31.154 5.75,30.803 6.281,30.803 v1(6.35,30.734) ; v1(7.228,36.629) 7.17,36.687 7.17,45.535 6.985,45.72 v1(6.985,46.482) 8.001,46.482 v1(8.128,46.609) ; v1(12.525,45.354) 12.54,45.354 13.208,44.686 13.208,44.07 13.568,43.71 13.568,42.82 14.723,41.665 U5.6
SCK: C16.11 U4.14 U5.18 U7.15 U8.12 | length 37.2
  Top Layer w0.2: C16.11 2.292,27.692 2.292,29.695 6.092,33.494 6.316,33.494 7.237,34.415 7.523,34.415 8.022,34.915 U8.12 7.847,35.57 7.788,36.714 7.788,37.506 ; U7.15 4.036,41.475 4.029,41.475 3.631,41.077 3.631,37.645 4.244,37.032 5.58,37.032 7.505,37.506 7.622,37.506 7.788,37.506 ; U7.15@4.144,41.475 4.327,41.658 v1(5.178,41.658) ; U4.14 14.929,39.579 14.183,38.832 14.183,38.469 13.686,37.973 11.418,37.973 11.095,37.65 10.883,37.506 7.788,37.506
  Bottom Layer w0.2: U5.18 3.547,42.935 4.826,41.656 5.176,41.656 v1(5.178,41.658)
SCL: C16.16 R8.1 | length 2.6
  Bottom Layer w0.2: R8.1 16.391,26.551 C16.16
SDA: C16.15 R9.1 | length 5.6
  Bottom Layer w0.2: R9.1 13.103,26.551 13.22,26.668 13.22,27.124 13.704,27.608 14.908,27.608 C16.15
SOLAR: P2.2 R3.2 R6.1 U3.4 | length 12.9
  Top Layer w0.203: v1(6.096,8.509) 6.096,6.985 6.771,6.31 8.961,6.31 v1(11.128,4.143)
  Bottom Layer w0.203: U3.4 10.757,3.81 11.091,4.143 v1(11.128,4.143)
  Bottom Layer w0.508: P2.2 8.191,1.587 8.826,1.587 9.449,2.21 9.67,2.21 9.702,2.242 9.702,3.768 9.745,3.81 U3.4
  other v1: 7.493,0.889 8.509,0.889 7.493,1.905 8.509,1.905
TXD: C16.24
TXEN: U5.7 U5.8 U7.9 U7.19 U8.5 U8.7 | length 29.5
  Top Layer w0.2: U8.7 4.026,51.875 4.525,52.374 4.949,52.374 5.309,52.734 7.163,52.734 8.022,51.875 U8.5 7.62,50.992 U7.9 7.568,48.817 7.568,46.377 9.398,44.547 ; U7.19 10.16,40.894 9.398,41.656 9.398,44.547 ; v1(12.525,44.577) 9.398,44.577 9.398,44.547
  Bottom Layer w0.2: v1(12.525,44.577) 12.448,44.5 12.448,44.335 12.441,44.328 13.208,43.561 13.208,42.671 14.574,41.305 14.657,41.305 15.567,40.395 U5.7 U5.8
pads on no net: C16.0 C16.28 C16.29 LS1.3 P4.0 R4.1 U4.6 U4.7 U4.8 U4.9 U4.11 U7.4 U7.5 U7.8 U7.17 U7.18 U8.8

## Polygon pours and split planes (outlines as drawn)
GND on Bottom Layer "NONET_L02_P-001" (solid, remove dead copper, pour order 2): 0,53.34 0,0 18.034,0 18.034,53.34
GND on Top Layer "NONET_L02_P-001" (solid, remove dead copper, pour order 0): 0,53.34 0,0 18.034,0 18.034,53.34

## Keep-outs
Keep-Out Layer:
  lines w0.076: 0,0 0,0 ; 0,0 18.034,0 ; 0,0 0,33.02 0,53.34 18.034,53.34 18.034,0 ; 18.034,0 18.034,0

## Other copper
Top Layer:
  rectangle net RSTPORT: 0.127,8.128 3.048,9.652
Bottom Layer:
  rectangle net RSTPORT: 0.127,8.128 3.048,9.652

## Silkscreen, mask and mechanical layers (free items; w line width, h text height)
Top Overlay:
  drawing of 5380 lines, arcs and shapes, not listed
  text "meshcn.net" at 4.314,37.08 h1
  text "GE24" at 7.616,23.626 h1 r270
  text "GT22" at 9.013,23.626 h1 r270
  text "GR20" at 10.41,23.626 h1 r270
  text "-BEEP+" at 10.94,15.766 h0.89 r180
  text "B-38" at 7.489,12.831 h1 r270
  text "L-33" at 8.886,12.831 h1 r270
  text "K-32" at 10.283,12.831 h1 r270
  text "SOLAR+ -" at 11.611,3.76 h0.89 r180
Bottom Overlay:
  drawing of 5384 lines, arcs and shapes, not listed
  text "meshcn.net" at 12.958,51.939 h1.02
  text "Yuri_su" at 11.357,38.433 h0.8
  text "154301G" at 11.23,37.157 h0.8
  text "Meshtastic" at 12.881,35.379 h0.8
  text "V1.1 250213" at 12.881,33.652 h0.8
  text "L-33" at 8.132,31.238 h1
  text "K-32" at 9.275,26.031 h1
  text "B-38" at 9.275,23.618 h1
  text "TX" at 15.394,19.712 h0.8 r90
  text "GPS" at 13.489,19.023 h0.8
  text "+" at 11.657,18.829 h0.8 r180
  text "RX" at 15.394,17.172 h0.8 r90
  text "-" at 11.511,16.991 h0.8 r270
  text "T" at 12.092,16.029 h0.8 r90
  text "R" at 12.092,14.759 h0.8 r90
  text "EN" at 15.394,14.646 h0.8 r90
  text "-BEEP+" at 10.559,14.587 h0.89
Top Solder:
  rectangle: 0.127,8.128 3.048,9.652
Bottom Solder:
  rectangle: 0.127,8.128 3.048,9.652
Mechanical 1:
  lines w0.076: -0.033,53.34 18.034,53.34 18.034,0 0,0 -0.033,53.34

## Text inside footprints (layer, text, board x,y; h text height)
C16: Top Overlay "B+" at 4.154,4.131 h0.95 r180; Top Overlay "B-" at 13.607,1.796 h0.95 r180; Top Overlay "006" at 15.154,4.271 h0.95 r180; Top Overlay "008" at 15.154,7.631 h0.95 r180; Top Overlay "GND" at 15.154,9.382 h0.95 r180; Top Overlay "GND" at 15.154,11.938 h0.95 r180; Top Overlay "GND" at 5.987,7.638 h0.95 r180; Top Overlay "020" at 15.154,17.048 h0.95 r180; Top Overlay "022" at 15.154,19.604 h0.95 r180; Top Overlay "024" at 15.154,22.159 h0.95 r180; Top Overlay "100" at 15.154,24.715 h0.95 r180; Top Overlay "011" at 15.154,27.27 h0.95 r180; Top Overlay "104" at 15.154,30.881 h0.95 r180; Top Overlay "106" at 15.154,32.381 h0.95 r180; Top Overlay "009" at 5.348,32.381 h0.95 r180; Top Overlay "010" at 2.395,30.625 h0.95 r270; Top Overlay "111" at 2.395,27.45 h0.76 r270; Top Overlay "113" at 2.395,24.91 h0.95 r270; Top Overlay "017" at 15.154,14.493 h0.95 r180; Top Overlay "115" at 5.098,22.116 h0.95 r180; Top Overlay "002" at 5.348,19.604 h0.95 r180; Top Overlay "029" at 5.348,17.048 h0.95 r180; Top Overlay "031" at 5.015,14.493 h0.95 r180; Top Overlay "RST" at 5.987,9.416 h0.95 r180; Top Overlay "VCC" at 2.649,12.718 h0.95 r270; Top Overlay "101" at 11.412,27.323 h0.95 r270; Top Overlay "102" at 9.761,27.323 h0.95 r270; Top Overlay "107" at 7.983,27.323 h0.95 r270; Top Overlay "-CD+" at 5.398,29.058 h1.4 r270